# Allegro board C074P02-IPCAM-M1-Audio-A01.brd
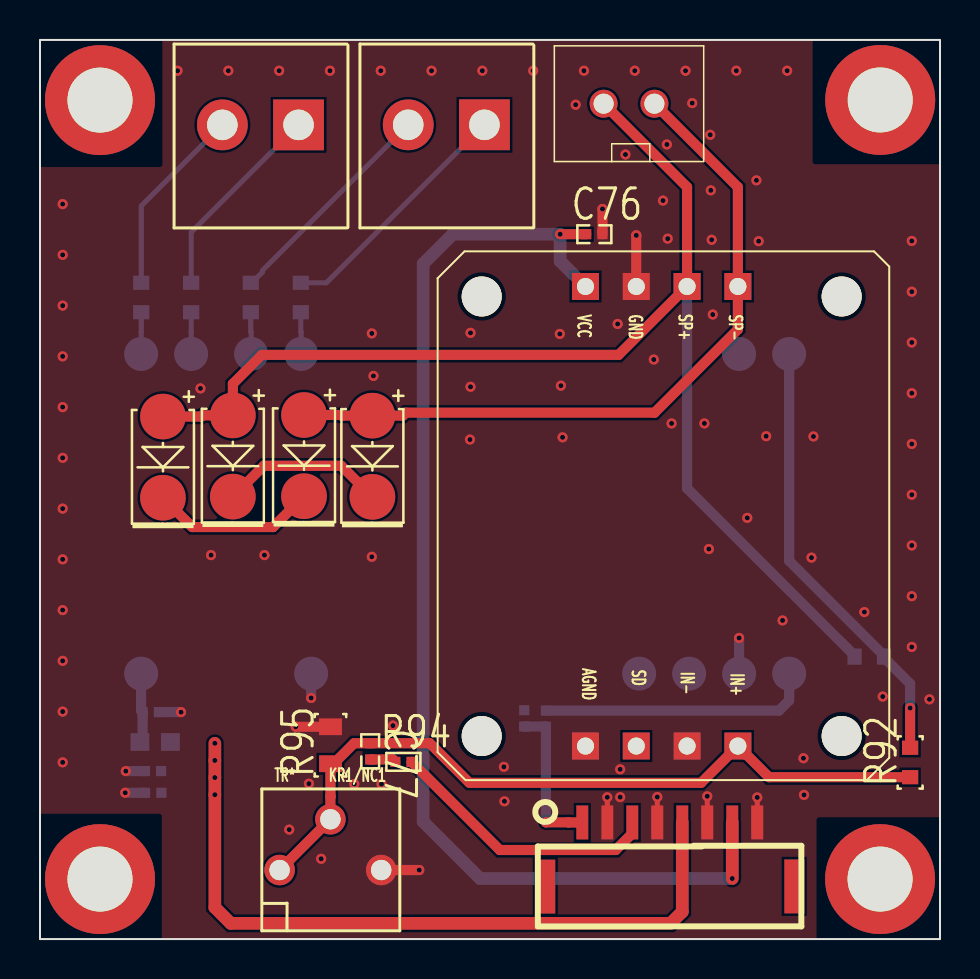
[diagram p0: board, top side]
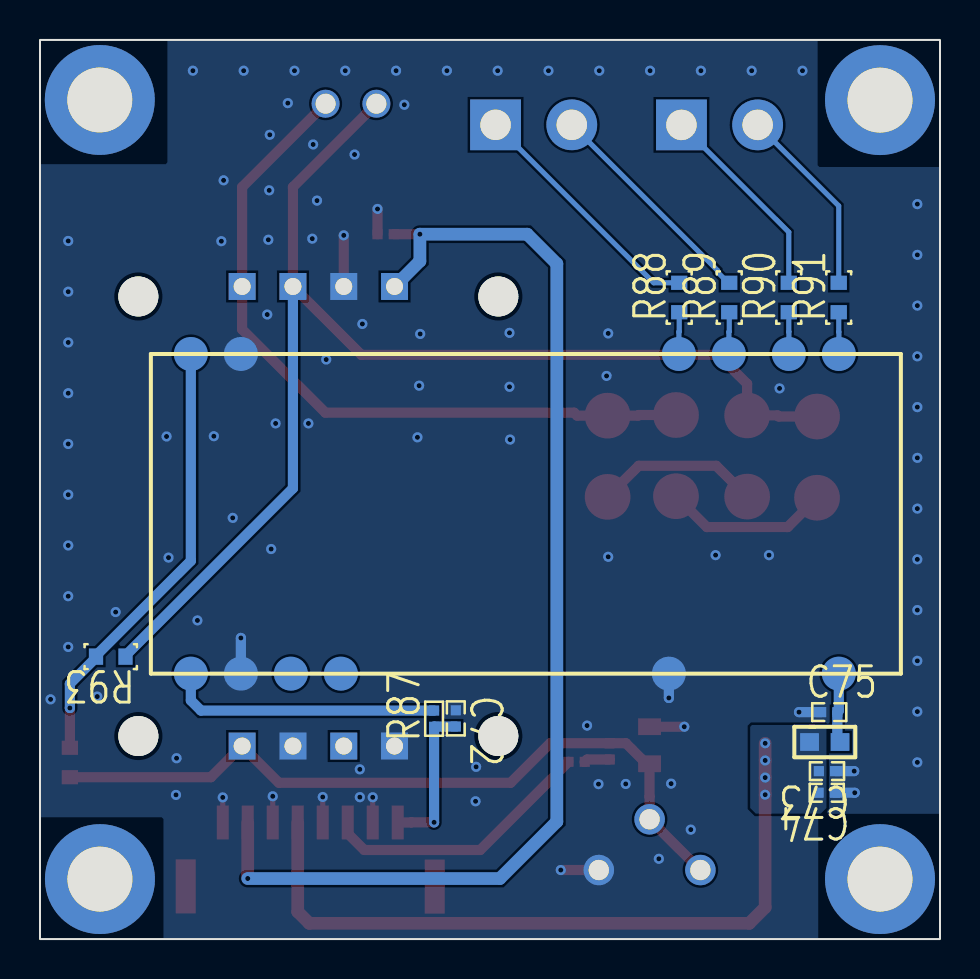
[diagram p1: board, bottom side, seen from below]

Outline 45 x 45 mm; copper layers: TOP, BOTTOM. Coordinates in mm from the lower left corner of the outline.
Outline path: rectangle 0,0 45,45

## Design rules (mm)
net group AU_COM: nets AU_COM N17450564
net group LINE_09OUT_IPCIN: nets LINE_09OUT_IPCIN LINE_IN-IPC
net group N17445167: nets N17445167 N17445431
net group N17445169: nets N17445169 N17445447
net group N17445171: nets N17445171 N17445449
net group N17445173: nets N17445173 N17445451
net group LINE_FEEDBACK: nets LINE_FEEDBACK LINE_OUT_IN-PA SPK+

## Placement (name value [footprint] x y rotation side)
C72  10NF  [SC0402]  24.21 11.04 270 bottom
C73  10UF/25V  [SC0402]  5.65 8.4 0 bottom
C74  10NF/25V  [SC0402]  5.66 7.32 0 bottom
C75  10NF/25V  [SC0402]  5.54 11.36 180 bottom
C76  10NF  [SC0402]  27.72 35.28 0 top
C77  10UF  [SC0402]  16.51 9.39 270 top
D37  SML4737A  [SMA]  13.2 24.2 270 top
D38  SML4737A  [SMA]  16.62 24.16 270 top
D39  SML4737A  [SMA]  6.15 24.12 270 top
D40  SML4737A  [SMA]  9.64 24.18 270 top
J14  MIC0  [CON-1X2P-381-KF127]  20.32 40.75 180 top
J15  MIC1  [CON-1X2P-381-KF127]  11.02 40.75 180 top
J16  HEADER 8  [GH1_25_8P]  31.49 2.63 0 top
J17  SPK  [XHB254_2P]  29.45 41.81 0 top
KR1/NC1  KR202  [TR-3362P]  14.52 5.99 0 top
LB4  BLM18PG121SN1D  [SL0603]  5.76 9.86 180 bottom
M1  NC  [HOLE6C3_5MM]  3 41.99 0 top
M2  NC  [HOLE6C3_5MM]  42.01 42 0 top
M3  NC  [HOLE6C3_5MM]  3 3 0 top
M4  NC  [HOLE6C3_5MM]  42 3 0 top
R87  0R  [SR0402]  25.3 11.03 90 bottom
R88  0R  [SR0603]  13.04 32.11 90 bottom
R89  0R  [SR0603]  10.54 32.11 90 bottom
R90  0R  [SR0603]  7.56 32.11 90 bottom
R91  0R  [SR0603]  5.06 32.11 90 bottom
R92  0R  [SR0603]  43.51 8.84 90 top
R93  0R/NC  [SR0603]  41.46 14.13 0 bottom
R94  0R  [SR0402]  18.17 8.87 0 top
R95  33R  [SR0805]  14.52 9.7 90 top
U12  ATH8809  [ATH8809_MA]  39.46 13.28 180 bottom
U13  AP3001  [AP3001-MA]  31.08 21.16 270 top

## Library data of the parts
C72-C77 = CAP_NP: room: 6
D37-D40 = BZX84C10/SOT_0: room: 6
J14 J15 J17 = CON2: room: 6
J16 = HEADER 8: room: 6
KR1/NC1 = KR: room: 6
LB4 = LB: room: 6
M1-M4 = ID-BOARD_1: room: 1
R87-R94 = R: signal model: DEFAULT_RESISTOR_33000OHM_1_2; room: 6
R95 = R_0: room: 6
U12 = ATH8809: room: 6
U13 = AP3001: room: 6

## Footprints (pads in the part's own frame, mm; a bottom-side part is the same pattern mirrored in y, then rotated)
AP3001-MA
  round 1.999 hole 1.999 unplated: (-11.001,8.999) (-11.001,-8.999) (11.001,8.999) (11.001,-8.999)
  rect 1.349x1.349 hole 0.851: 1(11.501,-3.81) 2(11.501,-1.27) 3(11.501,1.27) 4(11.501,3.81) 5(-11.501,3.81) 6(-11.501,1.27) 7(-11.501,-1.27) 8(-11.501,-3.81)
ATH8809_MA
  round 1.699 smd: 1(1.999,0) 2(4.501,0) 3(7,0) 4(9.5,0) 5(25.9,0) 6(34.399,0) 7(34.399,16) 8(31.9,16) 9(28.9,16) 10(26.401,16) 11(4.501,16) 12(1.999,16)
CON-1X2P-381-KF127
  rect 2.54x2.54 hole 1.524: 1(-1.905,0)
  round 2.54 hole 1.524: 2(1.905,0)
GH1_25_8P
  rect 1.001x2.7 smd: (-6.225,-0.01) (6.225,0)
  rect 0.599x1.699 smd: 1(-4.374,3.2) 2(-3.124,3.2) 3(-1.874,3.2) 4(-0.625,3.2) 5(0.625,3.2) 6(1.874,3.2) 7(3.124,3.2) 8(4.374,3.2)
HOLE6C3_5MM
  round 5.5 hole 3.25: 1(0,0)
SC0402
  rect 0.508x0.508 smd: 1(-0.406,0) 2(0.406,0)
SL0603
  rect 0.94x0.889 smd: 1(-0.762,0) 2(0.762,0)
SMA
  round 2.286 smd: 1(-2.032,0) 2(2.032,0)
SR0402
  rect 0.508x0.508 smd: 1(-0.406,0) 2(0.406,0)
SR0603
  rect 0.711x0.813 smd: 1(-0.737,0) 2(0.737,0)
SR0805
  rect 0.838x1.143 smd: 1(-0.927,0) 2(0.927,0)
TR-3362P
  round 1.524 hole 1.016: 1(-2.54,-2.54) 2(0,0) 3(2.54,-2.54)
XHB254_2P
  round 1.399 hole 1.001: 1(-1.27,0) 2(1.27,0)

## Nets
5V0_BD: C73.2 C74.2 J16.5 LB4.1
12V0: C76.1 J16.7 U13.8(VCC)
GND: C72.1 C73.1 C74.1 C75.1 C76.2 J16.2 J16.4 J16.6 J16.8 KR1/NC1.3 R95.2(B) U12.2(AGND) U12.5(GND) U12.11(HP_AGND) U13.1(AGND) U13.3(IN-) U13.7(GND)
AU_COM: J16.3 R94.2(B)
LINE_09OUT_IPCIN: R87.2(B) U12.1(LINE_OUT)
LINE_FEEDBACK: R92.2(B) R93.2(B) U12.12(LINE_IN)
LINE_IN-IPC: C72.2 J16.1 R87.1(A)
LINE_OUT_IN-PA: C77.1 KR1/NC1.1 KR1/NC1.2 R92.1(A) R95.1(A) U13.4(IN+)
PA_SD: U13.2(SD)
SPK+: D39.1(CATHODE) D40.1(CATHODE) J17.1 R93.1(A) U13.6(SP+)
SPK-: D37.1(CATHODE) D38.1(CATHODE) J17.2 U13.5(SP-)
N17445167: R88.1(A) U12.10(MIC0+)
N17445169: R89.1(A) U12.9(MIC0-)
N17445171: R90.1(A) U12.8(MIC1+)
N17445173: R91.1(A) U12.7(MIC1-)
N17445189: C75.2 LB4.2 U12.6(VCC5V)
N17445431: J14.1 R88.2(B)
N17445447: J14.2 R89.2(B)
N17445449: J15.1 R90.2(B)
N17445451: J15.2 R91.2(B)
N17450564: C77.2 R94.1(A)
N17450584: D37.2(ANODE) D39.2(ANODE)
N17450586: D38.2(ANODE) D40.2(ANODE)

Pads without a net: M1 1; M2 1; M3 1; M4 1; U12 3 4

## Via types
v1: diameter 0.508, hole 0.254, TOP to BOTTOM, 104 vias

## Routing (per net, layer and track width the routed paths; a pad name or vN(x,y) marks a point on that pad's centre or on a via; arc(x,y) is an arc through that point)
5V0_BD: length 36.6
  TOP w0.635: J16.5 32.11,1.37 31.53,0.79 9.54,0.79 8.74,1.58 v1(8.74,7.22) v1(8.74,8.08) v1(8.74,8.94) v1(8.74,9.8)
12V0: length 59.3
  TOP w0.508: C76.1 v1(26.01,35.28)
  TOP w0.635: J16.7 v1(34.61,3.03)
  BOTTOM w0.635: U13.8 26.01,33.93 v1(26.01,35.28) 20.64,35.28 19.16,33.8 19.16,5.88 22,3.03 v1(34.61,3.03)
GND: length 18.6
  TOP w0.254: J16.2 v1(28.36,7.09) ; J16.4 v1(30.86,7.11) ; J16.6 v1(33.36,7.15) ; J16.8 v1(35.86,7.09)
  TOP w0.508: KR1/NC1.3 v1(18.96,3.45) ; C76.2 v1(28.12,36.54) ; R95.2 v1(12.79,10.63) ; U13.7 v1(29.81,35.22)
  BOTTOM w0.508: U12.2 v1(34.96,15.07) ; U12.5 v1(13.56,12.07) ; C75.1 v1(7.05,11.36) ; C74.1 v1(4.26,7.32) ; C73.1 v1(4.29,8.4)
  vias: v1(1.13,36.78) v1(1.13,34.24) v1(1.13,31.7) v1(1.13,29.16) v1(1.13,26.62) v1(1.13,24.08) v1(1.13,21.54) v1(1.13,19) v1(1.13,16.46) v1(1.13,13.92) v1(1.13,11.38) v1(1.13,8.84) v1(6.88,43.46) v1(8.02,27.56) v1(8.55,19.22) v1(9.42,43.46) v1(11.22,19.22) v1(11.96,43.46) v1(12.46,5.48) v1(13.45,7.78) v1(14.06,4.02) v1(14.5,43.46) v1(15.71,7.76) v1(16.59,30.31) v1(16.59,19.13) v1(16.67,28.18) v1(17.04,43.46) v1(17.08,7.76) v1(17.65,10.68) v1(19.58,43.46) v1(21.53,30.34) v1(21.53,27.64) v1(21.5,25) v1(22.12,43.46) v1(23.19,8.62) v1(23.22,6.89) v1(24.66,43.46) v1(25.99,30.29) v1(26.04,27.7) v1(26.13,25.11) v1(26.78,41.76) v1(27.2,43.46) v1(28.88,30.79) v1(29.01,8.49) v1(29.01,7.1) v1(29.27,39.27) v1(29.74,43.46) v1(30.69,29) v1(31.15,36.96) v1(31.34,39.77) v1(31.39,35.06) v1(31.58,25.81) v1(32.28,43.46) v1(32.61,41.84) v1(33.22,25.81) v1(33.44,19.52) v1(33.51,40.25) v1(33.54,37.47) v1(33.58,35) v1(33.64,31.26) v1(34.82,43.46) v1(35.36,21.08) v1(35.82,37.97) v1(35.93,34.93) v1(36.31,25.17) v1(37.13,15.95) v1(37.36,43.46) v1(38.17,9.05) v1(38.2,7.21) v1(38.57,19.09) v1(38.67,25.15) v1(41.22,16.37) v1(42.14,12.14) v1(43.59,34.94) v1(43.59,32.4) v1(43.59,29.86) v1(43.59,27.32) v1(43.59,24.78) v1(43.59,22.24) v1(43.59,19.7) v1(43.59,17.16) v1(43.59,14.62) v1(44.47,12)
AU_COM: length 13.8
  TOP w0.508: R94.2 22.99,4.46 28.78,4.46 29.61,5.29 J16.3
LINE_09OUT_IPCIN: length 13.7
  BOTTOM w0.508: R87.2 36.95,11.43 37.46,11.94 U12.1
LINE_FEEDBACK: length 22.2
  TOP w0.508: R92.2 v1(43.51,11.56)
  BOTTOM w0.508: v1(43.51,11.56) 43.51,12.78 42.2,14.08 R93.2 42.2,14.19 37.46,18.93 U12.12
LINE_IN-IPC: length 7.7
  TOP w0.508: v1(25.3,5.84) 26.43,5.84 26.43,5.84 J16.1
  BOTTOM w0.508: C72.2 25.28,10.64 R87.1 v1(25.3,5.84)
LINE_OUT_IN-PA: length 38
  TOP w0.508: KR1/NC1.1 KR1/NC1.2 14.52,7.14 14.52,7.14 R95.1 14.68,8.77 15.7,9.8 C77.1 19.49,9.8 21.47,7.82 33.05,7.82 U13.4 36.45,8.1 R92.1
SPK+: length 62.7
  TOP w0.508: J17.1 32.35,37.64 U13.6 28.93,29.24 11.09,29.24 9.64,27.79 D40.1 8.12,26.21 8.06,26.15 D39.1
  BOTTOM w0.508: U13.6 32.35,22.56 40.73,14.19 R93.1
SPK-: length 36.5
  TOP w0.508: J17.2 34.89,37.64 U13.5 34.89,30.51 30.73,26.35 18.29,26.35 18.14,26.2 D38.1 15.1,26.2 15.06,26.23 D37.1
N17445167: length 2.1
  BOTTOM w0.254: R88.1 13.04,30.4 13.06,30.39 U12.10
N17445169: length 2.1
  BOTTOM w0.254: U12.9 10.56,30.39 10.54,30.41 R89.1
N17445171: length 2.1
  BOTTOM w0.254: U12.8 7.56,30.39 7.56,30.39 R90.1
N17445173: length 2.1
  BOTTOM w0.254: R91.1 5.06,30.39 5.06,30.39 U12.7
N17445189: length 3.5
  BOTTOM w0.508: U12.6 5.06,11.43 C75.2 5.13,9.99 LB4.2
N17445431: length 12.5
  BOTTOM w0.254: J14.1 14.31,32.85 R88.2
N17445447: length 11.2
  BOTTOM w0.254: R89.2 10.59,32.85 11.12,33.38 11.12,33.46 J14.2
N17445449: length 10.1
  BOTTOM w0.254: R90.2 7.56,35.38 J15.1
N17445451: length 9.6
  BOTTOM w0.254: J15.2 5.06,36.7 R91.2
N17450564: length 1.3
  TOP w0.508: C77.2 17.65,8.99 R94.1
N17450584: length 8.3
  TOP w0.508: D37.2 11.66,20.62 7.61,20.62 D39.2
N17450586: length 8.3
  TOP w0.508: D38.2 15.06,23.69 11.19,23.69 D40.2

## Copper pours and planes (outline as drawn; the poured copper is in the pictures)
5V0_BD on BOTTOM: 9.49,6.55 9.49,10.62 9.4,10.71 5.77,10.71 5.68,10.62 5.68,6.56 5.97,6.27 9.21,6.27
GND on TOP: 0.01,0.01 0.01,44.99 44.99,44.99 44.99,0.01 ; 1 cut-out
GND on BOTTOM: 0.01,0.01 0.01,44.99 44.99,44.99 44.99,0.01

## Text on the board
DEVICE_TYPE_TOP: FIGURE | SIZE | 10.0 | 33.5 | 39.402 | 40.0 | 60.0 | 127.953 | 78.701 | DRILL CHART: TOP to BOTTOM | ALL UNITS ARE IN MILS | TOLERANCE | +0.0/-0.0 | +1.0/-1.0 | PLATED | NON-PLATED | QTY | 104 | 8 | 2 | 3 | 4
